# EAGLE board atx_distributor_v2.0 (EAGLE 6.4)
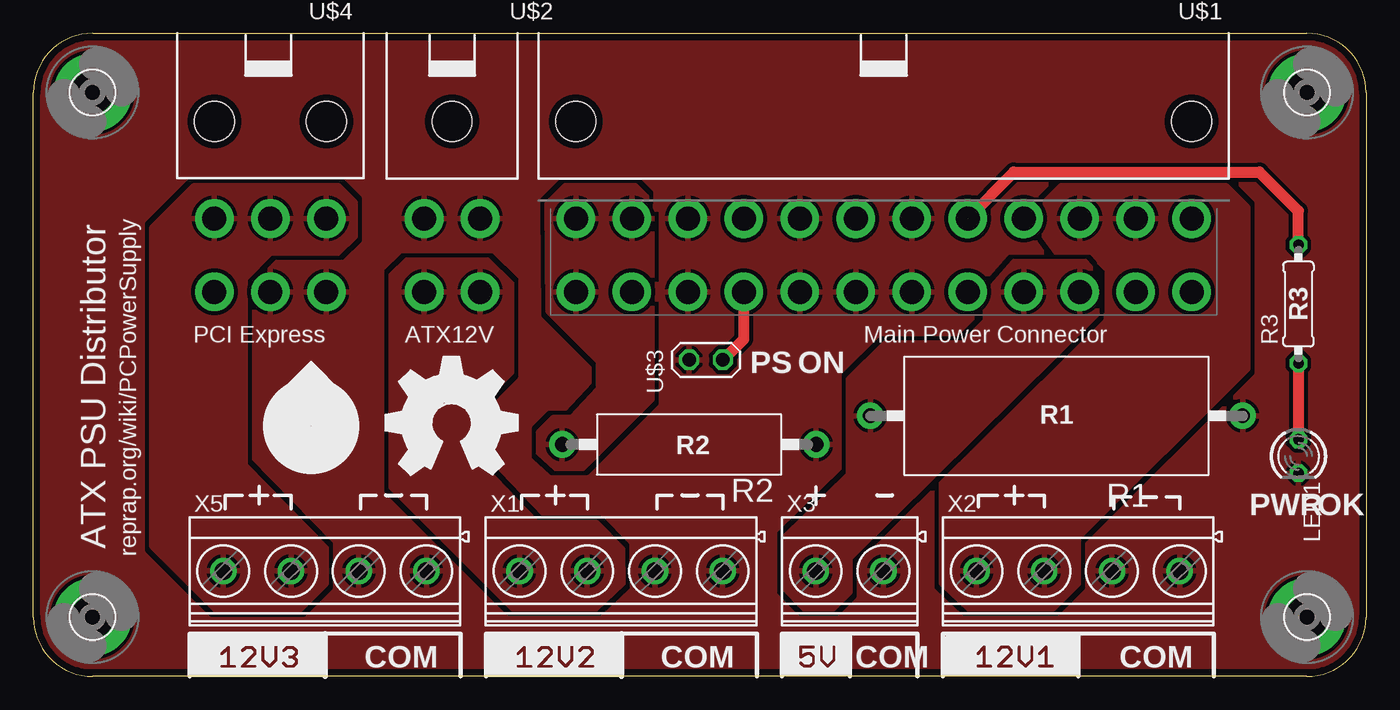
[diagram p0: board, top side]
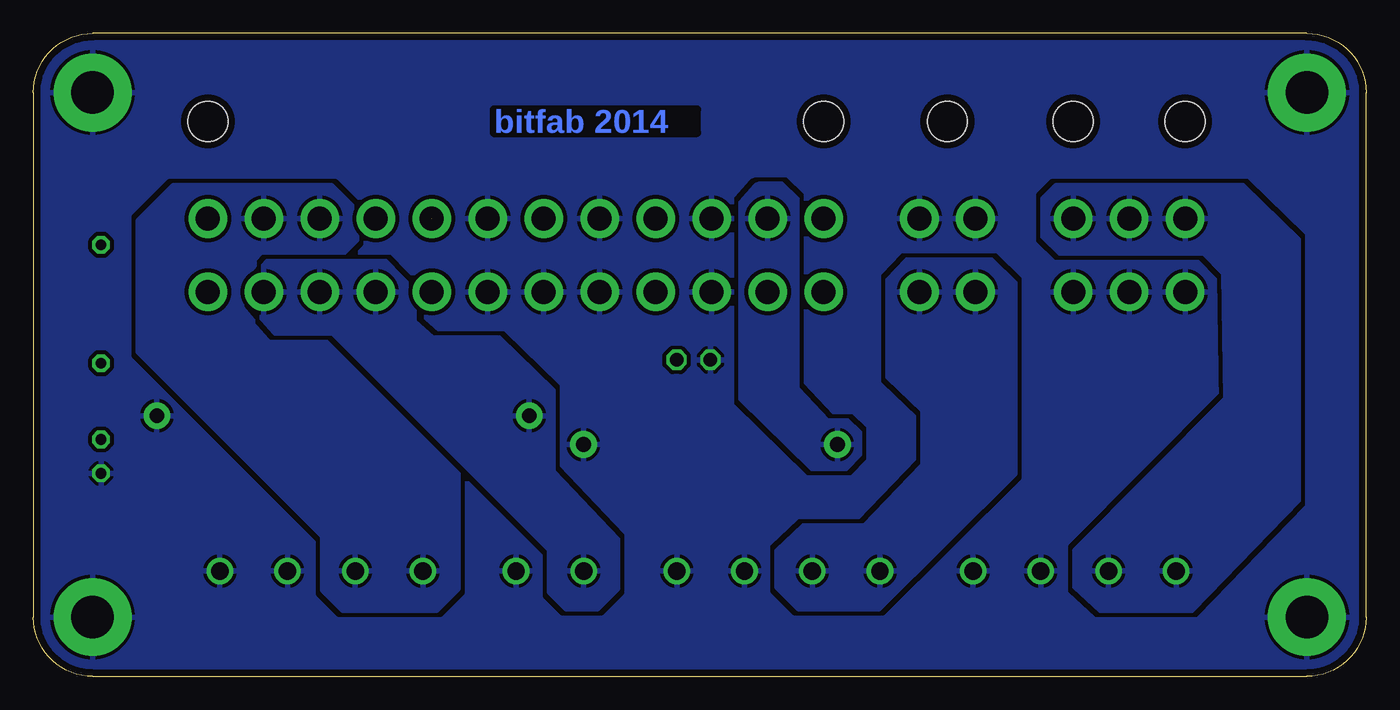
[diagram p1: board, bottom side, seen from below]

Size 100 x 48.26 mm. Coordinates in mm from the lower left corner, seen from the top.
Outline: 100,43.81 100,4.45 arc-90 95.56,0 4.45,0 arc-90 0,4.45 0,43.81 arc-90 4.45,48.26 95.56,48.26 arc-90 100,43.81
Copper layers (1*16): Top 0.035mm / dielectric 1.5mm / Bottom 0.035mm
Design rules "default *": minimum track width 10mil, minimum drill 24mil, track to track 12mil, track to pad 12mil, pad to pad 12mil, via to via 12mil, smd to smd 12mil, copper to edge 20mil, drill to drill 8mil, minimum pad ring 10mil, minimum via ring 8mil, stop-mask expansion 8mil, vias tented up to drill 0mil, thermal gap 10mil

## Footprints (pad centres in the part's own frame; a part is rotated, then mirrored left to right if it is on the bottom)
3,2-PAD = drill 3.2 pad 5.842: B3,2 0,0
LED3MM = drill 0.813 octagon: A -1.27,0; K 1.27,0
HPS923 = drill 1.1 pad 2: 1 -13.97,0; 2 13.97,0
CA4050 = drill 1.1 pad 2: 1 -9.525,0; 2 9.525,0
0207/10 = drill 0.813 octagon: 1 -4.445,0; 2 4.445,0
ATX24 = drill 1.8 pad 2.9: 1 23.1,6.03; 2 18.9,6.03; 3 14.7,6.03; 4 10.5,6.03; 5 6.3,6.03; 6 2.1,6.03; 7 -2.1,6.03; 8 -6.3,6.03; 9 -10.5,6.03; 10 -14.7,6.03; 11 -18.9,6.03; 12 -23.1,6.03; 13 23.1,11.53; 14 18.9,11.53; 15 14.7,11.53; 16 10.5,11.53; 17 6.3,11.53; 18 2.1,11.53; 19 -2.1,11.53; 20 -6.3,11.53; 21 -10.5,11.53; 22 -14.7,11.53; 23 -18.9,11.53; 24 -23.1,11.53 | hole 3: -23.1,-1.27; 23.1,-1.27
ATX2X2 = drill 1.8 pad 2.9: 1 2.1,6.03; 2 -2.1,6.03; 3 2.1,11.53; 4 -2.1,11.53 | hole 3: 0,-1.27
PINHD-2X1 = drill 1.016 octagon: 1 0,-1.27; 2 0,1.27
ATX2X3 = drill 1.8 pad 2.9: 1 4.2,6.03; 2 0,6.03; 3 -4.2,6.03; 4 4.2,11.53; 5 0,11.53; 6 -4.2,11.53 | hole 3: -4.2,-1.27; 4.2,-1.27
MKDSN1,5/4-5,08 = drill 1.3 pad 2: 1 -7.641,0.025; 2 -2.561,0.025; 3 2.519,0.025; 4 7.599,0.025
MKDSN1,5/2-5,08 = drill 1.3 pad 2: 1 -2.561,0.025; 2 2.519,0.025

## Placement (x,y rotation side)
H1  MOUNT-PAD-ROUND3.2  [3,2-PAD]  95.56,43.81 180 top
H2  MOUNT-PAD-ROUND3.2  [3,2-PAD]  4.45,4.45 180 top
H3  MOUNT-PAD-ROUND3.2  [3,2-PAD]  95.56,4.45 180 top
H4  MOUNT-PAD-ROUND3.2  [3,2-PAD]  4.45,43.81 180 top
LED1  [LED3MM]  94.92,16.51 270 top
R1  20R/5W  [HPS923]  76.76,19.56 180 top
R2  220R/3W  [CA4050]  49.2,17.4 180 top
R3  1K  [0207/10]  94.92,27.94 90 top
U$1  ATX24-REVERSIBLE  [ATX24]  63.8,40.39 180 top
U$2  ATX2X2  [ATX2X2]  31.42,40.39 180 top
U$3  PINHD-2X1  [PINHD-2X1]  50.47,23.75 90 top
U$4  ATX2X3  [ATX2X3]  17.78,40.39 180 top
U$5  [REPRAP_BSTOP]  77.6,39.62 0 top
U$6  [OSHS_10X200_BSTOP]  71.12,40.01 0 top
U$7  [OSHW_FILLX350_NOTEXT]  26.42,15.11 0 top
X1  MKDSN1,5/4-5,08  [MKDSN1,5/4-5,08]  44.12,7.87 0 top
X2  MKDSN1,5/4-5,08  [MKDSN1,5/4-5,08]  78.41,7.87 0 top
X3  MKDSN1,5/2-5,08  [MKDSN1,5/2-5,08]  61.27,7.87 0 top
X5  MKDSN1,5/4-5,08  [MKDSN1,5/4-5,08]  21.89,7.87 0 top

## Library data of the parts
H1-H4 = holes
LED1 = led
R1 R2 = resistor-power; OC_FARNELL: unknown; OC_NEWARK: unknown
R3 = resistor
U$1 U$2 U$4 = SparkFun
U$3 = pinhead_2p
U$5-U$7 = ohw-logo
X1 X2 X5 = con-phoenix-508; MPN: SMKDSN1,5/4-5,08; OC_FARNELL: 1792905; OC_NEWARK: 70R0300
X3 = con-phoenix-508; MPN: MKDSN 1,5/2-5.08; OC_FARNELL: 1792903; OC_NEWARK: 30M2397

## Nets
12V2: U$2.3 U$2.4 X1.1 X1.2
12V3: U$4.1 U$4.2 U$4.3 X5.1 X5.2
+3V3: R2.2 U$1.1 U$1.2 U$1.13
+5V: R1.2 U$1.21 U$1.22 U$1.23 X3.1
+12V: U$1.10 U$1.11 X2.1 X2.2
GND: H1.B3,2 H2.B3,2 H3.B3,2 H4.B3,2 LED1.K R1.1 R2.1 U$1.3 U$1.5 U$1.7 U$1.15 U$1.17 U$1.18 U$1.19 U$2.1 U$2.2 U$3.2 U$4.4 U$4.5 U$4.6 X1.3 X1.4 X2.3 X2.4 X3.2 X5.3 X5.4
N$1: U$1.16 U$3.1
N$2: LED1.A R3.1
PWR_OK: R3.2 U$1.8

## Tracks (layer width: path | path; a pad name or v marks a point on that pad's centre or on a via)
12V2
  pour Top: 26.85,14.22 26.85,30.1 27.99,31.24 34.09,31.24 35.87,29.46 35.87,22.86 33.02,19.94 33.02,16.51 37.77,11.56 42.22,11.56 44.2,9.53 44.25,6.99 42.22,5.08 35.99,5.08
  pour Bottom (rank 2): 28.12,31.24 34.47,31.24 35.87,29.74 35.87,22.48 33.27,19.94 33.27,15.88 37.64,11.3 42.22,11.3 44.2,9.4 44.2,6.73 42.55,5.08 36.58,5.08 26.34,15.24 26.34,29.51
12V3
  pour Top: 12.06,36.83 22.86,36.83 24.13,35.56 24.13,33.02 22.86,31.75 17.78,31.75 15.88,29.84 15.88,15.88 21.97,9.65 21.97,6.99 19.94,4.95 13.72,4.95 8.89,9.78 8.89,33.66
  pour Bottom: 9.27,36.83 23.24,36.83 24.26,35.81 24.26,33.02 22.99,31.75 12.19,31.75 10.67,30.23 10.54,20.83 21.84,9.4 21.84,6.73 19.94,4.95 13.08,4.95 5.08,13.21 5.08,32.77
+3V3
  pour Top: 45.14,36.83 39.93,36.83 38.53,35.43 38.61,27.43 42.42,23.62 42.42,21.59 40.39,19.43 39.04,19.43 37.9,18.29 37.9,16.76 39.17,15.62 41.2,15.62 46.41,20.83 46.41,35.56
  pour Bottom: 45.52,36.96 43.87,36.96 42.72,35.81 42.72,21.59 40.44,19.18 38.91,19.18 38.02,18.29 38.02,16.64 39.04,15.62 41.58,15.62 46.91,20.83 46.91,35.56 45.77,36.83
+5V
  pour Top: 56.31,6.6 56.31,10.41 61.14,15.16 61.14,22.28 63.93,25.02 69.77,25.02 71.42,26.67 71.42,28.7 73.58,31.11 78.92,31.11 79.81,30.1 79.81,27.18 61.27,8.89 61.27,6.35 59.99,5.08 57.84,5.08
  pour Bottom: 71.42,26.64 71.42,28.93 73.58,31.11 82.47,31.11 83.87,29.46 83.87,28.07 81.84,25.78 77.52,25.78 61.27,9.53 61.27,6.35 59.99,5.08 57.71,5.08 56.19,6.6 56.19,10.29 61.01,15.37 61.01,21.46 65.08,25.4 70.03,25.4
+12V
  pour Top (isolate 0.305, rank 2): 75.87,33.02 75.87,35.56 77.14,36.83 89.46,36.83 91.11,35.18 91.11,23.11 78.41,10.41 78.41,6.99 76.5,5.08 70.16,5.08 68.12,6.99 68.12,14.73 80.57,27.18 80.57,30.48 79.43,31.62 76.89,31.62
  pour Bottom (rank 3): 77.65,36.83 75.74,34.92 75.74,32.77 76.76,31.75 82.73,31.75 84.38,29.59 84.38,27.69 82.35,25.27 78.16,25.53 68.12,15.49 68.12,6.6 69.77,4.95 76.76,4.95 78.28,6.48 78.28,10.54 92.13,24.38 92.13,34.16 89.46,36.83
GND
  pour Top (isolate 0.254, rank 3): -1.27,49.53 101.27,49.53 101.27,-1.27 -1.27,-1.27
  pour Bottom (isolate 0.254, rank 4): 100.89,49.15 100.89,-1.4 -1.14,-1.4 -1.14,49.15
N$1
  Top 0.813: U$3.1 53.3,25.31 U$1.16
N$2
  Top 0.254: R3.1 94.92,23.37
  Top 0.813: 94.92,23.37 LED1.A
PWR_OK  (1 unrouted)
  Top 0.813: U$1.8 73.56,37.85 92,37.85 94.92,34.92 R3.2

## Text on the board
Bottom: bitfab 2014
tPlace: R3 | PCI Express | ATX12V | Main Power Connector | PS | ON | R1 | R2 | PWR | OK | ATX PSU Distributor | reprap.org/wiki/PCPowerSupply | COM | COM | COM | COM
bRestrict: bitfab 2013
_bsilk: CC | Share-Alike 3.0 | Creative Commons